# Altium PCB EtherIOv3_2.PcbDoc (part 1 of 2)
Units mil, origin at the board's own origin, x right, y up, seen from the top; angles counter-clockwise.
Board outline 4380 x 2544.37 mil, 2 copper layers (Top Layer, Bottom Layer), stack 63.824 mil thick; 111 components, 138 nets, 525 pads, 210 vias.
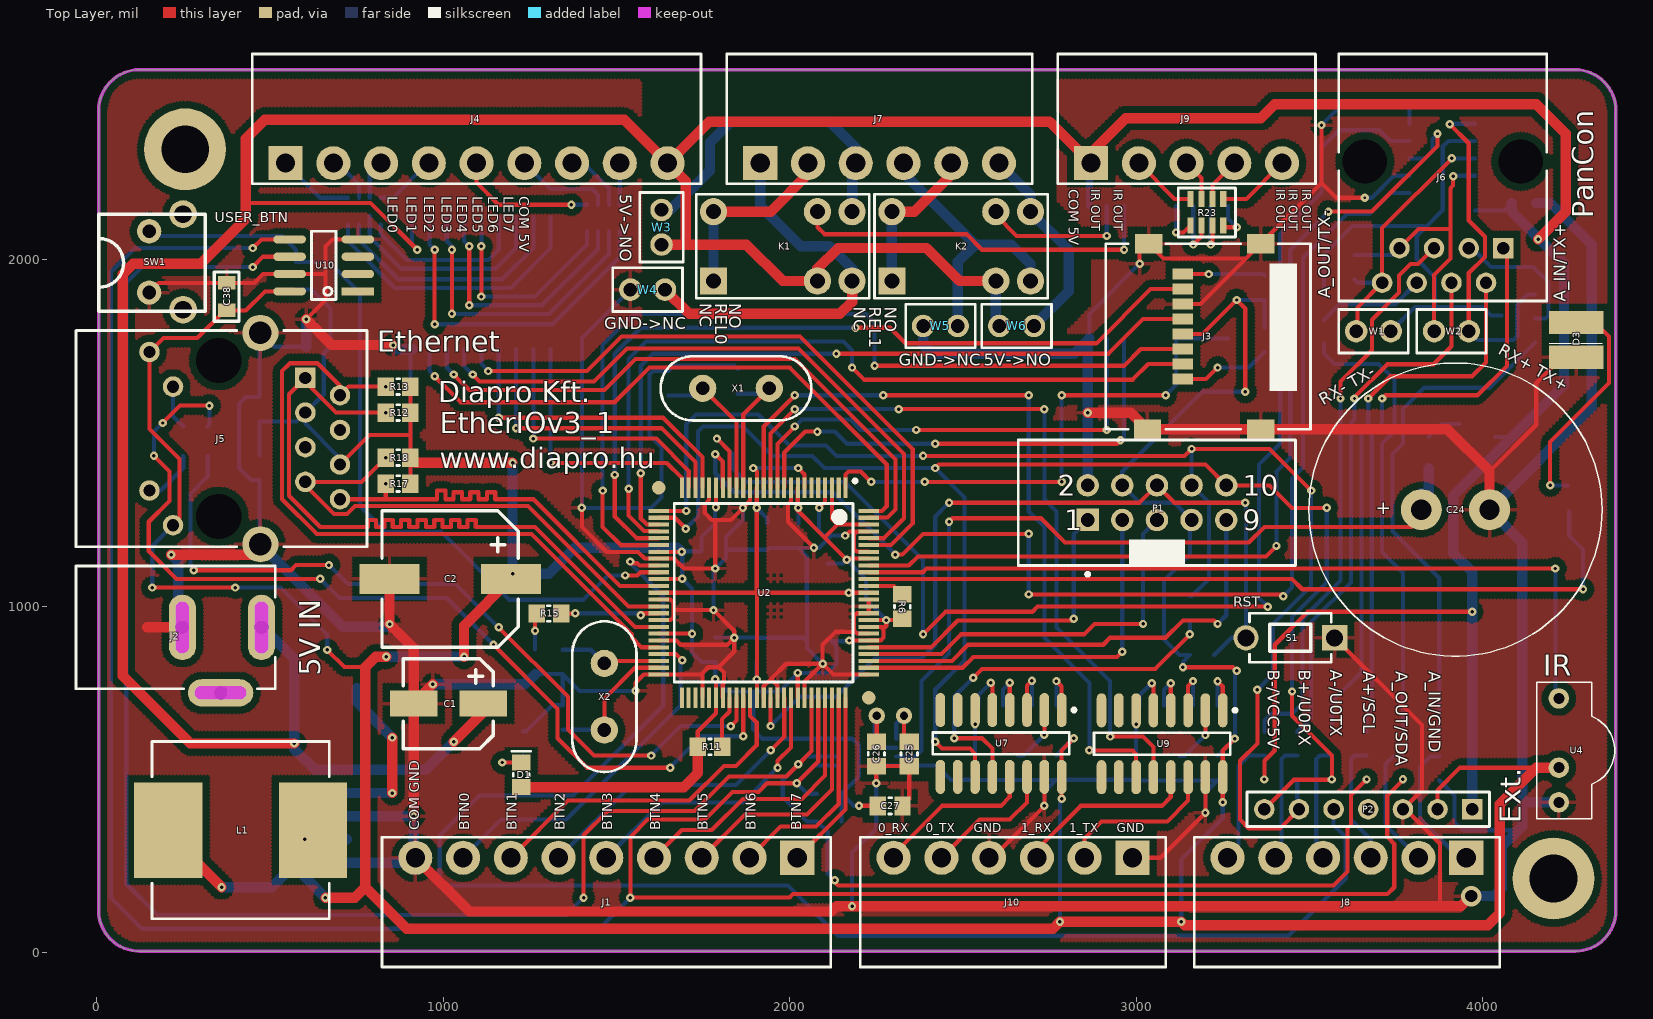
[diagram p0: Top Layer view]
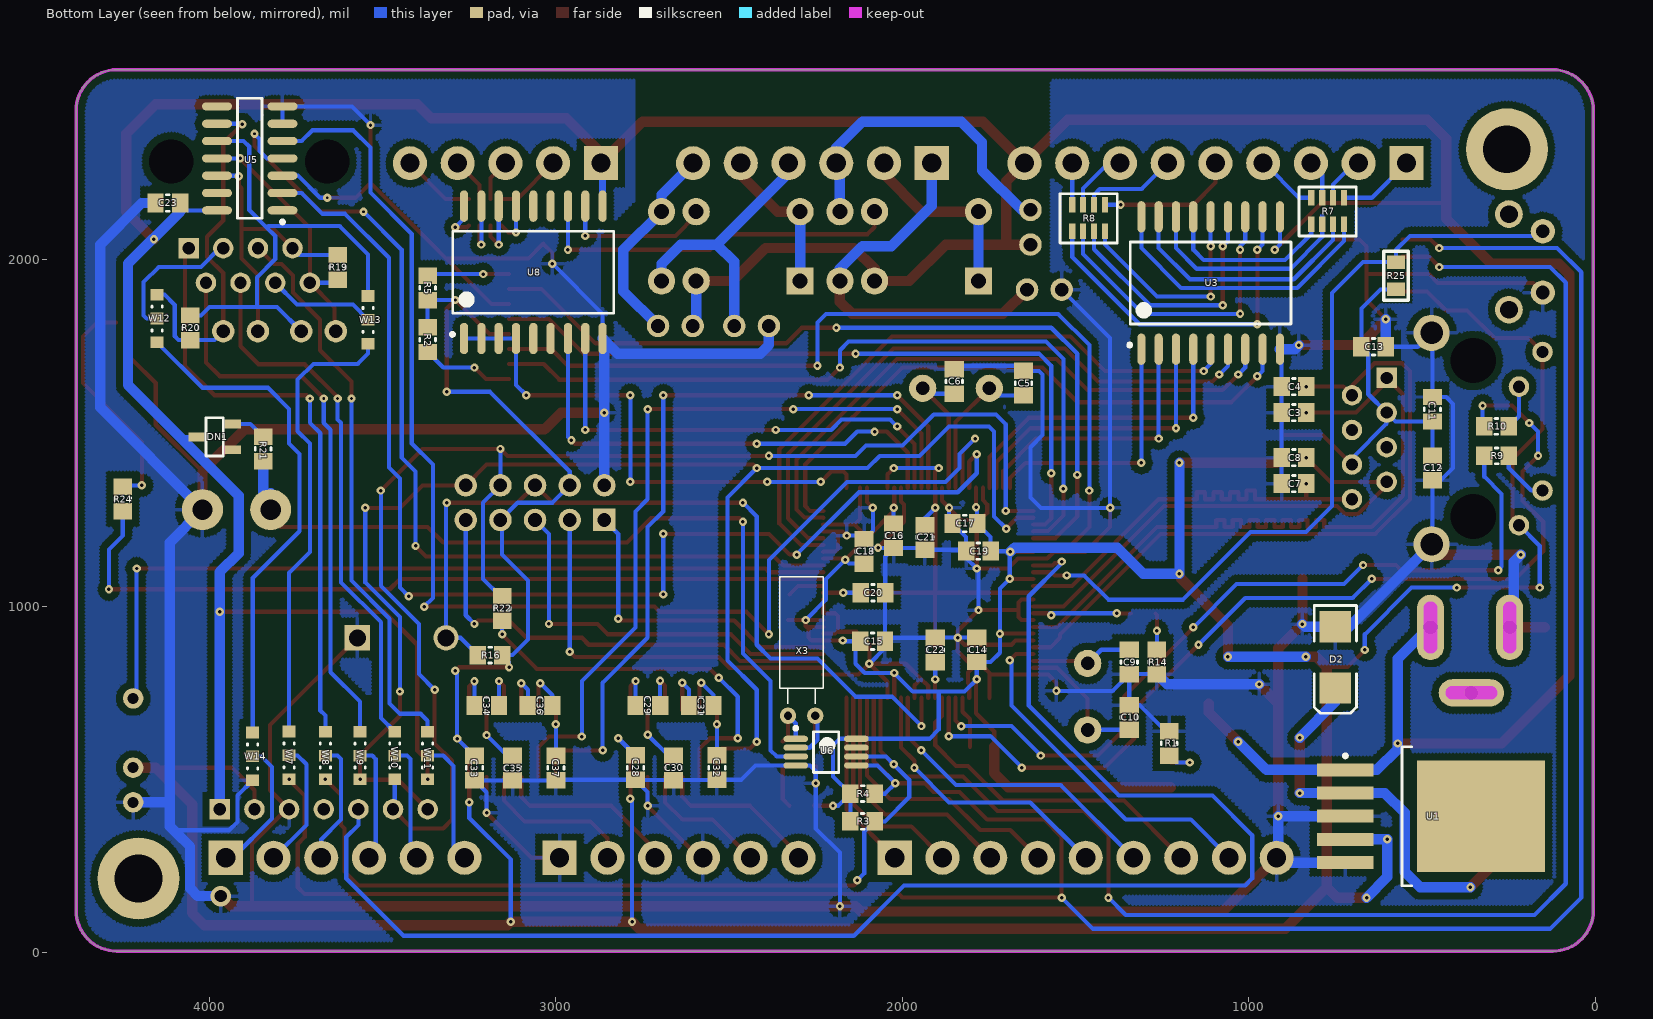
[diagram p1: Bottom Layer view, seen from below]

## Layer stack, top to bottom
Top Layer: signal copper 1.4
Dielectric: core 61.0236, FR-4, Dk 4.8
Bottom Layer: signal copper 1.4

## Board outline
5,122.87 5,2431.02 cw(c123.11,2431.02) 123.11,2549.13 4266.89,2549.13 cw(c4266.89,2431.02) 4385,2431.02 4385,122.87 cw(c4266.89,122.87) 4266.89,4.76 123.11,4.76 cw(c123.11,122.87)

## Design rules (kind name [scope] priority, off if disabled: settings)
Clearance Clearance_to_uc [All vs (InNamedPolygon('BottomLayer-GND'))  or (InNamedPolygon('Top Layer-GND'))] p1: gap=20
Clearance [Not OnLayer('Keep-Out Layer') vs Not OnLayer('Keep-Out Layer')] p2: gap=7
HoleSize [All] p1: absolutevalues=TRUE maxlimit=140 minlimit=1 maxpercent=80.000 minpercent=20.000
MinimumSolderMaskSliver [All] p1: minsoldermaskwidth=1
PolygonConnect [All] p1: connectstyle=Relief reliefconductorwidth=10 reliefentries=4 polygonreliefangle="90 Angle"
RoutingVias [All] p1: holewidth=8 width=24 viastyle="Through Hole" minholewidth=8 minwidth=24 maxholewidth=100 maxwidth=200
SilkscreenOverComponentPads [All] p1: minsilkscreentomaskgap=0
SolderMaskExpansion [All] p1: expansion=4
Width Width_Power [(InNet('NetU1_5') OR InNet('NetU1_18'))] p1: maxlimit=50 minlimit=10 preferedwidth=25
Width [All] p2: maxlimit=30 minlimit=8 preferedwidth=12
25 further rules are at their usual default settings.

## Classes and differential pairs
component class Supplements: C23 C24 C25 C26 C27 C28 C29 C30 C31 C32 C33 C34 C35 C36 C37 DN1 J6 J7 J8 J9 J10 K1 K2 P2 R19 R20 R21 R22 R23 U5 U6 U7 U8 U9 W1 W2 W3 W4 W5 W6 W7 W8 W9 W10 W11 W12 W13 W14 X3
component class EtherIOv3_2: C1 C2 C3 C4 C5 C6 C7 C8 C9 C10 C11 C12 C13 C14 C15 C16 C17 C18 C19 C20 C21 C22 C38 D1 D2 D3 J1 J2 J3 J4 J5 L1 P1 R1 R2 R3 R4 R5 R6 R7 R8 R9 R10 R11 R12 R13 R14 R15 R16 R17 R18 R24 R25 S1 SW1 U1 U2 U3 U4 U10 X1 X2

## Components (designator, comment, footprint, x,y, rotation, side; value= is the part's Value field where it differs from the comment)
C1 "100uF_25V" "ELECTROLIT CAP F80" 1015,719.45 r0 top
C2 "1000uF_6V3" "ELECTROLIT CAP J10" 1020,1079.45 r0 top
C3 "CAP" "0805 CAP" 869.57,1559.45 r0 bottom
C4 "CAP" "0805 CAP" 869.57,1634.45 r0 bottom
C5 "CAP" "0805 CAP" 1650,1644.45 r270 bottom
C6 "CAP" "0805 CAP" 1850,1649.45 r270 bottom
C7 "CAP" "0805 CAP" 869.57,1354.45 r0 bottom
C8 "CAP" "0805 CAP" 869.57,1429.45 r0 bottom
C9 "CAP" "0805 CAP" 1345,839.45 r90 bottom
C10 "CAP" "0805 CAP" 1345,679.45 r270 bottom
C11 "CAP" "0805 CAP" 470,1569.02 r270 bottom
C12 "CAP" "0805 CAP" 470,1399.88 r270 bottom
C13 "CAP" "0805 CAP" 639.57,1749.45 r180 bottom
C14 "CAP" "0805 CAP" 1785,874.88 r270 bottom
C15 "CAP" "0805 CAP" 2085.43,899.45 r0 bottom
C16 "CAP" "0805 CAP" 2025,1204.02 r90 bottom
C17 "CAP" "0805 CAP" 1819.57,1239.45 r180 bottom
C18 "CAP" "0805 CAP" 2110,1159.02 r270 bottom
C19 "CAP" "0805 CAP" 1780.43,1159.45 r180 bottom
C20 "CAP" "0805 CAP" 2084.57,1039.45 r0 bottom
C21 "CAP" "0805 CAP" 1935,1199.02 r90 bottom
C22 "CAP" "0805 CAP" 1905,874.02 r270 bottom
C23 "CAP" "0805 CAP" 4120,2164.45 r0 bottom
C24 "ELKO" Goldcap_1F 3921.57,1279.45 r180 top
C25 "CAP" "0805 CAP" 2345,574.45 r90 top
C26 "CAP" "0805 CAP" 2250,574.45 r90 top
C27 "CAP" "0805 CAP" 2290,424.45 r0 top
C28 "CAP" "0805 CAP" 2770,534.88 r270 bottom
C29 "CAP" "0805 CAP" 2734.57,714.45 r0 bottom
C30 "CAP" "0805 CAP" 2660,534.02 r270 bottom
C31 "CAP" "0805 CAP" 2580.43,714.45 r180 bottom
C32 "CAP" "0805 CAP" 2535,534.88 r270 bottom
C33 "CAP" "0805 CAP" 3235,534.02 r270 bottom
C34 "CAP" "0805 CAP" 3199.57,713.58 r0 bottom
C35 "CAP" "0805 CAP" 3125,533.15 r270 bottom
C36 "CAP" "0805 CAP" 3045.43,713.58 r180 bottom
C37 "CAP" "0805 CAP" 3000,534.02 r270 bottom
C38 "100nF" FP_0805_CAP_125 375,1894.45 r90 top
D1 "PWR" "0805 LED" 1225,514.02 r90 top
D2 "D Schottky" DSO-C2/X2.3 750,853.03 r270 bottom
D3 "LED_RED" "Osram sideled" 4270,1769.45 r90 top
DN1 "BAR43S" DIODE_SOT23_serial 3985,1489.45 r180 bottom
J1 "BUTTONS" "Euroblock 3.5pitch 9P" 2021.77,274.41 r180 top
J2 "PWR2.5" KLD-0202 -60,939.45 r0 top
J3 "MicroSD" microSD 3135,1656.14 r90 top
J4 "LEDS" "Euroblock 3.5pitch 9P" 545,2279.45 r0 top
J5 "EthernetConnector" LU1T516-43 30,1484.45 r90 top
J6 "RJ45-PanBeam" JACK1.27-2H8B 3885,2594.45 r180 top
J7 "Relays" "Euroblock 3.5pitch 6P" 1915,2279.45 r0 top
J8 "PB audio IN/Extension" "Euroblock 3.5pitch 6P" 3952.8,274.45 r180 top
J9 "Infra OUT" "Euroblock 3.5pitch 5P" 2870,2279.45 r0 top
J10 "RS232" "Euroblock 3.5pitch 6P" 2988.98,274.45 r180 top
K1 "REL0" RSY-12 1980,1939.45 r90 top
K2 "REL1" RSY-12 2495,1939.45 r90 top
L1 "100uH" INDP127127X85N 415,354.45 r0 top
P1 "Header 5X2" IDC2.54-V10D 3060,1299.45 r0 top
P2 "Extension" HDR1X7 3970,414.45 r180 top
R1 "RES" "0805 RES" 1230,604.45 r270 bottom
R2 "RES" "0805 RES" 3370,1769.88 r90 bottom
R3 "RES" "0805 RES" 2114.57,379.45 r0 bottom
R4 "RES" "0805 RES" 2114.57,459.45 r0 bottom
R5 "RES" "0805 RES" 3370,1919.45 r270 bottom
R6 "RES" "0805 RES" 2325,999.45 r270 top
R7 "4x Res Array" "1206 4XRES ARRAY" 725,2179.45 r0 bottom
R8 "4x Res Array" "1206 4XRES ARRAY" 1415,2159.45 r0 bottom
R9 "RES" "0805 RES" 284.57,1434.45 r180 bottom
R10 "RES" "0805 RES" 285,1519.45 r180 bottom
R11 "RES" "0805 RES" 1770,594.45 r180 top
R12 "RES" "0805 RES" 869.57,1559.45 r0 top
R13 "RES" "0805 RES" 869.57,1634.45 r0 top
R14 "RES" "0805 RES" 1265,839.88 r90 bottom
R15 "RES" "0805 RES" 1305,979.45 r0 top
R16 "RES" "0805 RES" 3190,859.45 r180 bottom
R17 "RES" "0805 RES" 869.57,1354.45 r0 top
R18 "RES" "0805 RES" 869.57,1429.45 r0 top
R19 "RES" "0805 RES" 3630,1978.78 r90 bottom
R20 "RES" "0805 RES" 4055,1804.21 r90 bottom
R21 "RES" "0805 RES" 3845,1454.45 r270 bottom
R22 "RES" "0805 RES" 3155,994.45 r270 bottom
R23 "4x Res Array" "1206 4xRES ARRAY" 3251.5,2176.22 r180 top
R24 "RES" "0805 RES" 4250,1309.88 r270 bottom
R25 "10k" FP_0805_RES 575,1954.45 r90 bottom
S1 "SW-PB" SPST-2 3445,909.45 r180 top
SW1 "SW_tactile_2pin" "BUTTON_6X6 90deg" 200,1994.45 r270 top
U1 "TS2576" TO-263-5L 475,394.45 r180 bottom
U2 "LM3S6911-IQC" QFP50P1600X1600X160-100N 1925,1039.45 r270 top
U3 "ULN2803A" SOIC127P1030X265-18N 1110,1933.5 r90 bottom
U4 "TSOP1736" TSOP17xx 4220,584.45 r90 top
U5 "MAX491ESD" NSO14_N 3883.62,2293.27 r0 bottom
U6 "MCP79411" MSOP8 2220,579.45 r180 bottom
U7 "MAX3232CSE" NSO16_M 2610,604.45 r270 top
U8 "ULN2803A" SOIC127P1030X265-18N 3065,1964.45 r90 bottom
U9 "MAX3232CSE" NSO16_M 3075,603.58 r270 top
U10 "MB85RC16PNF" DIGITAL_SOIC8 655,1984.45 r180 top
W1 "Jumper" Jumper 3685,1794.21 r180 top
W2 "Jumper" Jumper 3910,1794.21 r180 top
W3 "Jumper" JUMPER 1630,2094.45 r270 top
W4 "Jumper" JUMPER 1590,1914.45 r180 top
W5 "Jumper" JUMPER 2435,1809.45 r180 top
W6 "Jumper" JUMPER 2655,1809.45 r180 top
W7 "ALARM_OUT/SDA" "0603 3WAY JUMPER"#1 3770,604.45 r270 bottom
W8 "A+/SCL" "0603 3WAY JUMPER"#1 3665,603.9 r270 bottom
W9 "A-/U0TX" "0603 3WAY JUMPER"#1 3565,603.9 r270 bottom
W10 "B+/U0RX" "0603 3WAY JUMPER"#1 3465,603.9 r270 bottom
W11 "B-/VCC5V" "0603 3WAY JUMPER"#1 3370,603.9 r270 bottom
W12 "TX+/ALRM_IN" "0603 3WAY JUMPER"#2 4151,1834 r90 bottom
W13 "TX-/ALARM_OUT" "0603 3WAY JUMPER"#2 3542,1830 r90 bottom
W14 "ALRM_IN / GND" "0603 3WAY JUMPER"#2 3875,570 r90 bottom
X1 "CRYSTAL" CRYSTAL_LOW 1845,1629.45 r0 top
X2 "CRYSTAL" CRYSTAL_LOW 1465,739.45 r270 top
X3 "CRYSTAL" CRYSTAL_MINI 2290.63,684.45 r180 bottom

## Footprints (in the part's own frame and the unit in brackets; to place one, negate y for a bottom-side part, rotate by r counter-clockwise, add the part's x,y. Pads: shape width x height; smd on the part's side, far side on the other; paste and mask are expansions set on the pad)
"0603 3WAY JUMPER"#1 [mm] "Chip Resistor, 2-Leads, Body 1,6x0,8mm, IPC Medium Density"
  rect 0.85x0.95 smd: 1(-0.875,0) 2(0.875,0) 3(2.625,0)
  silkscreen extent -0.05,-0.38 1.8,0.38, body extent -0.8,-0.45 2.5,0.45, height 0.55
"0603 3WAY JUMPER"#2 [mm] "Chip Resistor, 2-Leads, Body 1,6x0,8mm, IPC Medium Density"
  rect 0.85x0.95 smd: 1(1.675,0) 2(-0.075,0) 3(-1.825,0)
  silkscreen extent -1,-0.38 0.85,0.38, body extent -1.7,-0.45 1.6,0.45, height 0.55
"0805 CAP" [mm] "Chip Capacitor, 2-Leads, Body 2,0x1,3mm, IPC Medium Density"
  rect 1.2x1.4 smd: 1(-0.9,0) 2(0.9,0)
  silkscreen extent -0.1,-0.6 0.1,0.6, body extent -1.05,-0.67 1.05,0.67, height 1
"0805 LED" [mm] "SMD LED, 2-Leads, Body 2,0x1,3mm, IPC Medium Density"
  rect 1.2x1.35 smd: 1(-0.9,0) 2(0.9,0)
  silkscreen extent -0.1,-0.7 1.73,0.7, body extent -1.05,-0.67 1.05,0.67, height 1
"0805 RES" [mm] "Chip Resistor, 2-Leads, Body 2,0x1,3mm, IPC Medium Density"
  rect 1.2x1.35 smd: 1(-0.9,0) 2(0.9,0)
  silkscreen extent -0.1,-0.58 0.1,0.58, body extent -1.05,-0.67 1.05,0.67, height 1
"1206 4XRES ARRAY" [mm] "Chip Resistor, 2-Leads, Body 3,2x1,6mm, IPC Medium Density"
  rect 0.45x1.15 smd: 1(0,0) 2(0.8,0) 3(1.6,0) 4(2.4,0) 5(2.4,1.95) 6(1.6,1.95) 7(0.8,1.95) 8(0,1.95)
  silkscreen extent -0.9,-0.8 3.3,2.8, body extent -0.6,-0.3 3,2.3, height 0.6
"1206 4xRES ARRAY" [mm] "Chip Resistor, 2-Leads, Body 3,2x1,6mm, IPC Medium Density"
  rect 0.45x1.15 smd: 1(0,0) 2(0.8,0) 3(1.6,0) 4(2.4,0) 5(2.4,1.95) 6(1.6,1.95) 7(0.8,1.95) 8(0,1.95)
  silkscreen extent -0.9,-0.8 3.3,2.8, body extent -0.6,-0.3 3,2.3, height 0.6
"BUTTON_6X6 90deg" [mil]
  round 70 hole 39.37: 1(88.5,-49) 2(-88.5,-49)
  round 80 hole 51: 3(-138,49) 3(138,49)
  silkscreen extent -137,-195 143,112, body extent -168,-199 171,110, height 287
CRYSTAL_LOW [mm]
  round 2 hole 1: 1(-2.44,0) 2(2.44,0)
  silkscreen extent -5.53,-2.35 5.53,2.35, body extent -5.6,-2.4 5.6,2.4, height 3.7
CRYSTAL_MINI [mm] "Furatszerelt D-3.1x8.2"
  round 1.2 hole 0.6: 1(-1,0) 2(1,0)
  silkscreen extent -1.6,0.89 1.6,10.2, body extent -1.5,2.1 1.49,10.1, height 3
DIGITAL_SOIC8 [mm]
  rect 2.4x0.6 smd: 1(-2.5,1.905)
  oval 2.4x0.6 smd: 2(-2.5,0.635) 3(-2.5,-0.635) 4(-2.5,-1.905) 5(2.5,-1.905) 6(2.5,-0.635) 7(2.5,0.635) 8(2.5,1.905)
  silkscreen extent -0.9,-2.5 0.9,2.5, body extent -3.03,-2.5 3.03,2.5, height 1.9
DIODE_SOT23_serial [mm] "SOT23-3 tok"
  rect 1.2x0.65 smd: A(1.327,-0.95) COM(-1.327,0) K(1.327,0.95)
  silkscreen extent -0.64,-1.4 0.64,1.4, body extent -1.27,-1.46 1.27,1.46, height 0.97
DSO-C2/X2.3 [mm] "DO-214-AA/SMB; 2 C-Bend Leads; Body 5.3 x 3.6 mm, inc. leads (LxW)"
  rect 2.3x2.3 smd: 1(-2.25,0) 2(2.25,0)
  silkscreen extent -3.8,-1.55 4.1,1.55
"ELECTROLIT CAP F80" [mm]
  rect 3.5x1.9 smd: 1(-2.55,0) 2(2.55,0)
  silkscreen extent -3.3,-3.3 3.3,3.3, body extent -3.3,-3.3 3.3,3.3, height 7.6
"ELECTROLIT CAP J10" [mm]
  rect 4.4x2.2 smd: 1(-4.45,0) 2(4.45,0)
  silkscreen extent -5,-5 5,5, body extent -5,-5 5,5, height 10
"Euroblock 3.5pitch 5P" [mm] "3.5 mm pitch 5P connector"
  rect 2.5x2.5 hole 1.4: 1(0,0)
  round 2.5 hole 1.4 mask+0.102: 2(3.5,0) 3(7,0) 4(10.5,0) 5(14,0)
  silkscreen extent -2.45,-1.5 16.45,8, body extent -2.45,-1.5 16.45,8, height 7.2
"Euroblock 3.5pitch 6P" [mm] "3.5 mm pitch 6P connector"
  rect 2.5x2.5 hole 1.4: 1(0,0)
  round 2.5 hole 1.4 mask+0.102: 2(3.5,0) 3(7,0) 4(10.5,0) 5(14,0) 6(17.5,0)
  silkscreen extent -2.45,-1.5 19.95,8, body extent -2.45,-1.5 19.95,8, height 7.2
"Euroblock 3.5pitch 9P" [mm] "3.5 mm pitch 9P connector"
  rect 2.5x2.5 hole 1.4: 1(0,0)
  round 2.5 hole 1.4 mask+0.102: 2(3.5,0) 3(7,0) 4(10.5,0) 5(14,0) 6(17.5,0) 7(21,0) 8(24.5,0) 9(28,0)
  silkscreen extent -2.45,-1.5 30.45,8, body extent -2.45,-1.5 30.45,8, height 7.2
FP_0805_CAP_125 [mm] "0805 kapacitás YAGEO/NIC 1.25 mm magas"
  rect 1x1.3 smd: 1(-1,0) 2(1,0)
  silkscreen extent -1.8,-0.9 1.8,0.9, body extent -1,-0.64 1.03,0.64, height 1.25
FP_0805_RES [mm] "0805 ellenállás"
  rect 1x1.3 smd: 1(-1,0) 2(1,0)
  silkscreen extent -1.8,-0.9 1.8,0.9, body extent -1,-0.62 1,0.63, height 0.62
Goldcap_1F [mm] "Goldcap 1F 21.5x8mm"
  round 3 hole 1.5: 1(-2.5,0) 2(2.5,0)
  silkscreen extent -10.75,-10.75 10.75,10.75, body extent -10.72,-10.7 10.7,10.76, height 8
HDR1X7 [mm] "Connector; Header; 7 Position"
  rect 1.5x1.5 hole 0.9: 1(0,0)
  round 1.5 hole 0.9: 2(2.54,0) 3(5.08,0) 4(7.62,0) 5(10.16,0) 6(12.7,0) 7(15.24,0)
  silkscreen extent -1.27,-1.27 16.51,1.27
IDC2.54-V10D [mm] "Connector; IDC, Low Profile Male Header, Thru-Hole; 10 Position; Vertical; Pitch 2.54 mm; Body 20.32 x 9.2 x 9.45 mm (LxWxH)"
  rect 1.65x1.65 hole 1: 1(-5.08,-1.27)
  round 1.65 hole 1: 2(-5.08,1.27) 3(-2.54,-1.27) 4(-2.54,1.27) 5(0,-1.27) 6(0,1.27) 7(2.54,-1.27) 8(2.54,1.27) 9(5.08,-1.27) 10(5.08,1.27)
  silkscreen extent -10.16,-5.37 10.16,4.6, body extent -10.16,-4.6 10.16,4.6, height 9.45
INDP127127X85N [mm] "Precision Wire Wound Inductor, 2-Leads, Body 12,7x12,7mm, IPC Medium Density"
  rect 5x7 smd: 1(-5.3,0) 2(5.3,0)
  silkscreen extent -6.5,-6.5 6.5,6.5, body extent -6.5,-6.5 6.5,6.5, height 8.5
JACK1.27-2H8B [mm] "Connector; PCB Jack, Thru-Hole; 1-Port, 8 Positions, 8 Loaded; Unshielded without Lightpipes; Right Angle"
  rect 1.5x1.5 hole 0.9: 1(-4.445,14.23)
  round 1.5 hole 0.9: 2(-3.175,16.77) 3(-1.905,14.23) 4(-0.635,16.77) 5(0.635,14.23) 6(1.905,16.77) 7(3.175,14.23) 8(4.445,16.77)
  round 2.95 hole 3.25 unplated: MH1(-5.715,7.88) MH2(5.715,7.88)
  silkscreen extent -7.62,0 7.62,18.1, body extent -7.62,0 7.62,18.1, height 8.65
Jumper [mm] "Jumper, 2.54 pitch"
  round 1.65 hole 1: 1(-1.27,0) 2(1.27,0)
  silkscreen extent -2.55,-1.6 2.55,1.6, body extent -2.54,-1.6 2.54,1.6, height 8.54
JUMPER [mm] "Jumper, 2.54 pitch"
  round 1.65 hole 1: 1(-1.27,0) 2(1.27,0)
  silkscreen extent -2.55,-1.6 2.55,1.6, body extent -2.54,-1.6 2.54,1.6, height 8.54
KLD-0202 [mm] "DC Power Jack, 2.5mm, KLD Series, PCB Mount"
  oval 2x4.8 hole 1: 1(13.6,0) 2(7.8,0)
  oval 4.8x2 hole 1: 3(10.6,-4.8)
  Keep-Out Layer lines w1: 7.8,-1.4 7.8,1.4 ; 9.2,-4.8 12,-4.8 ; 13.6,-1.4 13.6,1.4
  silkscreen extent 0,-4.5 14.6,4.5, body extent 0,-4.5 14.6,4.5, height 10.7
LU1T516-43 [mm] "Connector; PCB Jack, Thru-Hole; 1-Port, 8 Positions, 8 Loaded; Shielded without Lightpipes; Right Angle"
  round 2.65 hole 1.651: MH1(7.747,-11.227) MH2(-7.747,-11.227)
  round 2.95 hole 3.302 unplated: MH3(5.715,-8.179) MH4(-5.715,-8.179)
  rect 1.5x1.5 hole 0.9: P1(4.445,-14.529)
  round 1.5 hole 0.9: P2(3.175,-17.069) P3(1.905,-14.529) P4(0.635,-17.069) P5(-0.635,-14.529) P6(-1.905,-17.069) P7(-3.175,-14.529) P8(-4.445,-17.069) P9(6.35,-3.099) P10(3.81,-4.826) P11(-3.81,-3.099) P12(-6.35,-4.826)
  silkscreen extent -7.92,-19.05 7.92,2.29, body extent -7.87,-19.05 7.87,2.29, height 12.09
microSD [mm]
  rect 0.8x1.5 smd: 1(0,0) 2(1.1,0) 3(2.2,0) 4(3.3,0) 5(4.4,0) 6(5.5,0) 7(6.6,0) 8(7.7,0)
  rect 1.45x2 smd: 9(-3.675,2.6) 10(9.925,2.5) 11(-3.675,-5.7) 12(9.925,-5.7)
  Top Overlay keep-out region: -0.888,-8.349 8.462,-8.349 8.462,-6.349 -0.888,-6.349
  silkscreen extent -3.67,-9.35 9.92,5.65
MSOP8 [mm] "MSOP, 8-Leads, Body 3,0x3,0mm (max), Pitch 0,65mm, IPC Medium Density"
  oval 1.8x0.45 smd: 1(-2.225,0.975) 2(-2.225,0.325) 3(-2.225,-0.325) 4(-2.225,-0.975) 5(2.225,-0.975) 6(2.225,-0.325) 7(2.225,0.325) 8(2.225,0.975)
  silkscreen extent -2.35,-1.5 0.92,1.87, body extent -1.52,-1.53 1.53,1.52, height 1.1
NSO14_N [mm] "SOIC, 14-Leads, Body 8.7x3.9mm, Pitch 1.27mm, IPC Medium Density"
  oval 2.2x0.6 smd: 1(-2.4,3.81) 2(-2.4,2.54) 3(-2.4,1.27) 4(-2.4,0) 5(-2.4,-1.27) 6(-2.4,-2.54) 7(-2.4,-3.81) 8(2.4,-3.81) 9(2.4,-2.54) 10(2.4,-1.27) 11(2.4,0) 12(2.4,1.27) 13(2.4,2.54) 14(2.4,3.81)
  silkscreen extent -2.52,-4.4 0.9,4.78, body extent -2,-4.38 2,4.38, height 1.75
NSO16_M [mm] "SOIC, 16-Leads, Body 9.9x3.9mm, Pitch 1.27mm, IPC Low Density"
  oval 2.5x0.7 smd: 1(-2.45,4.445) 2(-2.45,3.175) 3(-2.45,1.905) 4(-2.45,0.635) 5(-2.45,-0.635) 6(-2.45,-1.905) 7(-2.45,-3.175) 8(-2.45,-4.445) 9(2.45,-4.445) 10(2.45,-3.175) 11(2.45,-1.905) 12(2.45,-0.635) 13(2.45,0.635) 14(2.45,1.905) 15(2.45,3.175) 16(2.45,4.445)
  silkscreen extent -2.57,-5 0.8,5.47, body extent -2,-5 2,5, height 1.75
"Osram sideled" [mil]
  rect 67x157.48 smd paste+0: A(50,0)
  rect 67x157.48 smd: K(-50,0)
  silkscreen extent -10,-76 -10,78, body extent -77,-79 81,69, height 158
QFP50P1600X1600X160-100N [mm] "QFP,0.50mm pitch,square;25 pin X 25 pin,14.00mm X 14.00mm X 1.60mm H body"
  rect 1.5x0.3 smd: 1(-7.7,6) 2(-7.7,5.5) 3(-7.7,5) 4(-7.7,4.5) 5(-7.7,4) 6(-7.7,3.5) 7(-7.7,3) 8(-7.7,2.5) 9(-7.7,2) 10(-7.7,1.5) 11(-7.7,1) 12(-7.7,0.5) 13(-7.7,0) 14(-7.7,-0.5) 15(-7.7,-1) 16(-7.7,-1.5) 17(-7.7,-2) 18(-7.7,-2.5) 19(-7.7,-3) 20(-7.7,-3.5) 21(-7.7,-4) 22(-7.7,-4.5) 23(-7.7,-5) 24(-7.7,-5.5) 25(-7.7,-6) 51(7.7,-6) 52(7.7,-5.5) 53(7.7,-5) 54(7.7,-4.5) 55(7.7,-4) 56(7.7,-3.5) 57(7.7,-3) 58(7.7,-2.5) 59(7.7,-2) 60(7.7,-1.5) 61(7.7,-1) 62(7.7,-0.5) 63(7.7,0) 64(7.7,0.5) 65(7.7,1) 66(7.7,1.5) 67(7.7,2) 68(7.7,2.5) 69(7.7,3) 70(7.7,3.5) 71(7.7,4) 72(7.7,4.5) 73(7.7,5) 74(7.7,5.5) 75(7.7,6)
  rect 0.3x1.5 smd: 26(-6,-7.7) 27(-5.5,-7.7) 28(-5,-7.7) 29(-4.5,-7.7) 30(-4,-7.7) 31(-3.5,-7.7) 32(-3,-7.7) 33(-2.5,-7.7) 34(-2,-7.7) 35(-1.5,-7.7) 36(-1,-7.7) 37(-0.5,-7.7) 38(0,-7.7) 39(0.5,-7.7) 40(1,-7.7) 41(1.5,-7.7) 42(2,-7.7) 43(2.5,-7.7) 44(3,-7.7) 45(3.5,-7.7) 46(4,-7.7) 47(4.5,-7.7) 48(5,-7.7) 49(5.5,-7.7) 50(6,-7.7) 76(6,7.7) 77(5.5,7.7) 78(5,7.7) 79(4.5,7.7) 80(4,7.7) 81(3.5,7.7) 82(3,7.7) 83(2.5,7.7) 84(2,7.7) 85(1.5,7.7) 86(1,7.7) 87(0.5,7.7) 88(0,7.7) 89(-0.5,7.7) 90(-1,7.7) 91(-1.5,7.7) 92(-2,7.7) 93(-2.5,7.7) 94(-3,7.7) 95(-3.5,7.7) 96(-4,7.7) 97(-4.5,7.7) 98(-5,7.7) 99(-5.5,7.7) 100(-6,7.7)
  round 1 smd: 101(-7.7,-7.7) 102(7.7,7.7)
  Top Layer pour cut-out: 154 vertices and 0 holes, not listed, extent 6.7,6.7 8.7,8.7
  Top Layer pour cut-out: 154 vertices and 0 holes, not listed, extent -8.7,-8.7 -6.7,-6.7
  silkscreen extent -8.32,-6.55 6.55,6.83
RSY-12 [mm]
  round 2 hole 1.1: COIL1(0,-2.54) COIL2(5.08,-2.54) COM2(5.08,5.08) NC(0,-5.08) NO(5.08,-5.08)
  rect 2x2 hole 1.1: COM1(0,5.08)
  silkscreen extent -1.27,-6.35 6.35,6.35, body extent -1.27,-6.35 6.35,6.35, height 10.2
SOIC127P1030X265-18N [mm] "SOIC, 18-Leads, Body 11,8x7,6mm (max), Pitch 1,27mm, IPC Medium Density"
  oval 2.3x0.6 smd: 1(-4.85,5.08) 2(-4.85,3.81) 3(-4.85,2.54) 4(-4.85,1.27) 5(-4.85,0) 6(-4.85,-1.27) 7(-4.85,-2.54) 8(-4.85,-3.81) 9(-4.85,-5.08) 10(4.85,-5.08) 11(4.85,-3.81) 12(4.85,-2.54) 13(4.85,-1.27) 14(4.85,0) 15(4.85,1.27) 16(4.85,2.54) 17(4.85,3.81) 18(4.85,5.08)
  silkscreen extent -4.67,-5.9 3,6.06, body extent -3.8,-5.87 3.8,5.87, height 2.65
SPST-2 [mm] "Circuit Breaker; 2 Leads"
  rect 1.85x1.85 hole 1.25: 1(-3.25,0)
  round 1.85 hole 1.25: 2(3.25,0)
  silkscreen extent -3,-1.8 3,1.8
TO-263-5L [mm] "D2-PAK, 6-Pads, Body 8,3x10,2mm (max), IPC Medium Density"
  rect 4.15x0.95 smd: 1(-6.25,3.4) 2(-6.25,1.7) 3(-6.25,0) 4(-6.25,-1.7) 5(-6.25,-3.4)
  rect 9.4x8.2 smd: 6(3.7,0)
  silkscreen extent -6.38,-5.1 -1.4,5.1, body extent -2.1,-5.1 6.18,5.1, height 4.57
TSOP17xx [mm] "TSOP17xx IR Receiver"
  round 1.5 hole 0.8: 1(-3.81,0) 2(-1.27,0) 3(3.81,0)
  silkscreen extent -5,-4.09 5,1.6, body extent -5,-4.1 5,1.6, height 13.3

## Part data
C1 C2: "SMD Electrolit Capacitor"
C3 C4 C5 C6 C7 C8 C9 C10 C11 C12 C13 C14 C15 C16 C17 C18 C19 C20 C21 C22 C23 C25 C26 C27 C28 C29 C30 C31 C32 C33 C34 C35 C36 C37: "Capacitor"
C24: "Electrolit Capacitor"
C38: library part Cap, "Capacitor"
D1: library part LED2, "Typical RED, GREEN, YELLOW, AMBER GaAs LED"
D2: "Schottky Diode"
D3: library part LED_R, "Typical LED"
J1 J4: library part "Euroblock 9P connector"
J2: "Low Voltage Power Supply Connector"
J6: "PanBeam - RS485 + 2xAudio"
J7 J8 J10: library part "Euroblock 6P connector"
J9: library part "Euroblock 5P connector"
K1 K2: library part Relay, "SPDT Relay"
L1: library part Inductor, "Inductor"
P1: "Header, 5-Pin, Dual row"
P2: library part "Header 7", "Header, 7-Pin"
R1 R2 R3 R4 R5 R6 R9 R10 R11 R12 R13 R14 R15 R16 R17 R18 R19 R20 R21 R22 R24: "Resistor"
R7 R8 R23: "Isolated Resistor Network"
R25: library part Res3, "Resistor"
S1: "Switch"
U1: "Step Down DC-DC Converter"
U2: library part LM3S6611-IQC, "Stellaris ARM Cortex-M3 Microcontroller"
U3 U8: "8xDarlington Driver"
U4: library part TSOP17xx, "IR Receiver, 3-Pin"
U5: "Low-Power, Slew-Rate-Limited RS-485/RS-422 Transceiver"
U6: "MCP79411 I2C RTCC + MAC"
U7 U9: "3.0V TO 5.5V, Low-Power, up to 1Mbps, True RS-232 Transceiver Using Four 0.1µF External Capacitor"
U10: "MB85RC16PNF I2C MEM"
W1 W2 W3 W4 W5 W6: "Jumper Wire"
W7 W8 W9 W10 W11 W12 W13 W14: library part Jumper_3way, "Jumper Wire"
X1 X2 X3: "Crystal"

## Free pads (board coordinates)
  round 236.22 hole 137.8: 0(255,2319.45) 0(4205,214.45)

## Via types
v1: diameter 24, hole 10, Top Layer to Bottom Layer, 202 vias
v2: diameter 24, hole 8, Top Layer to Bottom Layer, 7 vias
v3: diameter 59.06, hole 35.43, Top Layer to Bottom Layer, 1 vias

## Nets (pads, with @x,y where several pads share a name; then routed paths per layer and width w, separated by ;. In a path a pad name is that pad's centre, name@x,y a point inside that pad or via, vN(x,y) a via of type N, cw(c..) or ccw(c..) an arc to the next point about the centre after c; other vN are vias at no path point)
A+: J6.1 W8.1 | length 1723.3
  Top Layer w12: v2(3710,1600) 3719.45,1609.45 3985,1609.45 4070,1694.45 4070,2024.21 J6.1@4060,2034.21
  Bottom Layer w12: W8.1@3665,638.35 3665,685 3680,700 3680,1500 3710,1530 v2(3710,1600)
A+/SCL: J8.3 W8.2 | length 357.8
  Bottom Layer w12: W8.2@3665,569.45 3630,569.45 3620,559.45 3620,384.45 3677.2,327.24 J8.3@3677.2,274.45
A-: J6.2 W9.1 | length 1618.2
  Top Layer w12: v2(3670,1600) 3734.45,1664.45 3970,1664.45 4010,1704.45 J6.2@4010,1934.21
  Bottom Layer w12: W9.1@3565,638.35 3565,725 3650,810 3650,1510 3670,1530 v2(3670,1600)
A-/U0TX: J8.4 W9.2 | length 342.2
  Bottom Layer w12: J8.4@3539.41,274.45 3520,293.86 3520,559.45 3530,569.45 W9.2@3565,569.45
ALARM_OUT: W7.1 W13.3 | length 1318.1
  Bottom Layer w12: W13.3@3542,1758.15 3542,1730 3572,1700 3700,1700 3745.5,1654.5 3745.5,1505.5 3710,1470 3710,1157 3770,1097 W7.1@3770,638.9
ALARM_OUT/SDA: J8.2 W7.2 | length 377
  Bottom Layer w12: W7.2@3770,570 3745.55,570 3720,544.45 3720,369.45 J8.2@3815,274.45 J8.2@3820,279.45
ALRM_IN: W12.3 W14.1 | length 1463
  Bottom Layer w12: W14.1@3875,635.94 3875,1082 3740,1217 3740,1440 3770,1470 3770,1570 3831.15,1631.15 4020,1631.15 W12.3@4151,1762.15
"ALRM_IN / GND": J8.1 W14.2 | length 397.7
  Bottom Layer w12: W14.2@3875,567.05 3850,567.05 3819,536.05 3819,388 3932.55,274.45 J8.1@3952.8,274.45
AN2: P2.4
B+: J6.4 W10.1 | length 1558.1
  Top Layer w12: v2(3630,1600) 3630,1604 3725,1699 3858,1699 3910,1751 J6.4@3910,1934.21
  Bottom Layer w12: W10.1@3465,638.35 3505,678.35 3505,954.45 3620,1069.45 3620,1530 3630,1540 v2(3630,1600)
B+/U0RX: J8.5 W10.2 | length 341.8
  Bottom Layer w12: J8.5@3401.61,274.45 3420,292.83 3420,559.45 3430,569.45 W10.2@3465,569.45
B-: J6.5 W11.1 | length 1646.7
  Top Layer w12: v2(3590,1600) 3590,1649 3680.48,1739.48 3680.48,1827.48 3759,1906 3759,1955 3792,1988 3813.79,1988 J6.5@3860,2034.21
  Bottom Layer w12: W11.1@3370,638.35 3370,670 3390,690 3450,690 3480,720 3480,964.45 3590,1074.45 v2(3590,1600)
B-/VCC5V: J8.6 W11.2 | length 365.3
  Bottom Layer w12: J8.6@3263.82,274.45 3295,305.63 3295,539.45 3325,569.45 W11.2@3370,569.45
BTN0: J1.8 U2.47 | length 1017.7
  Top Layer w12: U2.47@1621.85,862.28 1672.17,862.28 v1(1690,844.45)
  Bottom Layer w12: J1.8@1057.2,274.41 1167.24,384.45 1355,384.45 1685,714.45 1685,839.45 v1(1690,844.45)
BTN1: J1.7 U2.61 | length 989.5
  Top Layer w12: J1.7@1195,274.41 1360.04,439.45 1710,439.45 1810,539.45 1845,539.45 1905,599.45 1905,664.45 1885.63,683.82 U2.61@1885.63,736.3
BTN2: J1.6 U2.66 | length 908.7
  Top Layer w12: v1(1945,584.45) 1984.06,623.5 U2.66@1984.06,736.3
  Bottom Layer w12: J1.6@1332.8,274.41 1542.83,484.45 1845,484.45 v1(1945,584.45)
BTN3: J1.5 U2.67 | length 820
  Top Layer w12: v1(1965,534.45) 1965,554.45 2003.74,593.19 U2.67@2003.74,736.3
  Bottom Layer w12: J1.5@1470.59,274.41 1630.63,434.45 1865,434.45 v1(1965,534.45)
BTN4: J1.4 U2.72 | length 816.7
  Top Layer w12: J1.4@1608.39,274.41 1688.42,354.45 1775,354.45 1865,444.45 2035,444.45 2102.17,511.61 U2.72@2102.17,736.3
BTN5: J1.3 U2.73 | length 722.2
  Top Layer w12: J1.3@1746.18,274.41 1871.22,399.45 2050,399.45 2121.85,471.3 U2.73@2121.85,736.3
BTN6: J1.2 U2.74 | length 628.2
  Top Layer w12: J1.2@1883.98,274.41 1974.02,364.45 2075.87,364.45 2141.54,430.11 U2.74@2141.54,736.3
BTN7: J1.1 U2.75 | length 519.7
  Top Layer w12: J1.1@2021.77,274.41 2161.22,413.86 U2.75@2161.22,736.3
GND: C1.1 C2.1 C3.2 C4.2 C5.1 C6.1 C7.2 C8.2 C9.1 C10.1 C11.1 C12.2 C13.2 C14.1 C15.1 C16.1 C17.1 C18.1 C19.1 C20.1 C21.1 C22.1 C23.2 C24.1 C25.1 C26.1 C27.2 C28.2 C30.2 C32.2 C33.2 C35.2 C37.2 C38.2 D2.1 D3.K J1.9 J2.2 J3.6 J3.9 J3.10 J3.11 J3.12 J5.MH1 J5.MH2 J10.1 J10.4 P1.2 P2.3 R1.1 R14.1 S1.1 SW1.1 U1.3 U1.5 U2.4 U2.9 U2.15 U2.21 U2.33 U2.39 U2.42 U2.45 U2.50 U2.54 U2.57 U2.63 U2.65 U2.69 U2.76 U2.82 U2.85 U2.86 U2.87 U2.94 U2.97 U3.9 U4.1 U5.3 U5.6 U5.7 U6.4 U7.15 U8.9 U9.15 U10.4 U10.7 W4.2 W5.2 W14.3 | length 26292.7
  Top Layer w12: SW1.1@151,1905.95 178.87,1933.82 C38.2@375,1933.82 454.37,1933.82 480,1959.45 U10.7@556.57,1959.45 660,1959.45 ; v1(604.13,1828.58) 660,1884.45 660,1959.45 ; U10.4@753.43,2059.45 680,2059.45 660,2039.45 660,1959.45 ; v1(1400,1284.45) 1400,1229.45 1471.98,1157.46 1561.98,1157.46 1581.57,1137.87 U2.33@1621.85,1137.87 1666.57,1137.87 1695,1109.45 v1(1785,1109.45) 1785,1249.45 ; v1(1555,756.3) 1555,779.45 1578.78,803.23 U2.50@1621.85,803.23 1743.78,803.23 1747.83,807.28 ; U2.45@1621.85,901.65 1672.8,901.65 1685,889.45 1820,889.45 v1(1840,909.45) ; U2.42@1621.85,960.71 1655.98,960.71 1664.38,969.1 1664.38,989.45 ; U2.39@1621.85,1019.76 1655.98,1019.76 1664.38,1011.37 1664.38,989.45 ; U2.54@1747.83,736.3 1747.83,807.28 ; U2.21@1767.52,1342.6 1767.52,1306.97 1755,1294.45 1755,1269.45 1775,1249.45 1785,1249.45 ; U2.57@1806.89,736.3 1806.89,775.98 1810,779.09 1810,809.45 1795,824.45 ; U2.15@1885.63,1342.6 1885.63,1305.08 v1(1865,1284.45) 1830,1249.45 1785,1249.45 ; U2.63@1925,736.3 1925,770.43 1933.39,778.83 1934.38,778.83 1946.12,790.57 ; U2.65@1964.37,736.3 1964.37,772.31 1946.12,790.57 ; U2.9@2003.74,1342.6 2003.74,1303.19 1995,1294.45 1995,1244.45 v1(2070,1169.45) ; U2.69@2043.11,736.3 2043.11,782.56 v1(2095,834.45) ; v1(2085,1284.45) 2102.17,1301.61 U2.4@2102.17,1342.6 ; v1(2160,1204.45) 2172.17,1216.61 2194.02,1216.61 ; 2182.56,926.65 2132.2,926.65 2095,889.45 v1(2095,834.45) ; U2.76@2228.15,803.23 2126.22,803.23 v1(2095,834.45) ; U2.82@2228.15,921.34 2194.02,921.34 2185.62,929.73 2185.62,972 2194.02,980.39 U2.85@2228.15,980.39 U2.86@2228.15,1000.08 U2.87@2228.15,1019.76 ; U2.94@2228.15,1157.56 2227.46,1158.24 2193.33,1158.24 2185.62,1165.95 2185.62,1208.22 2194.02,1216.61 ; U2.97@2228.15,1216.61 2194.02,1216.61 ; v1(2250,489.45) C26.1@2250,539.02 C25.1@2345,539.02 2345,444.02 C27.2@2325.43,424.45 ; J10.4@2575.59,274.45 2585,274.45 v1(2735,424.45) U7.15@2735,507.99 ; J10.1@2988.98,274.45 3070,274.45 v1(3200,404.45) U9.15@3200,507.13 ; v1(3010,1989.45) 3010,2020.31 J3.10@3036.57,2046.89 3079.02,2004.45 3316.97,2004.45 ; J3.6@3135,1872.68 3185.2,1872.68 3316.97,2004.45 ; v1(3535,2389.45) 3535,2222.48 ; S1.1@3572.95,909.45 3825,657.4 3825,469.45 P2.3@3770,414.45 3777.76,414.45 3877.21,315 3877.21,136.24 3879,134.45 ; v2(3660,2179.45) 3578.03,2179.45 3535,2222.48 ; 4020,1389.45 4155,1524.45 4155,1644.45 D3.K@4225,1714.45 ; 1664.38,989.45 v1(1780,989.45) 1840,929.45 v1(1840,909.45) ; 1747.83,807.28 1765,824.45 1795,824.45 ; 1795,824.45 1840,869.45 v1(1840,909.45) ; 1946.12,790.57 1990,834.45 v1(2095,834.45) ; 3316.97,2004.45 J3.12@3359.41,2046.89 3535,2222.48
  Top Layer w30: 145,939.45 J2.2@247.09,939.45 ; v1(215,1149.45) 442,1149.45 J5.MH2@472,1179.45 J5.MH2@472,1176.17 ; v1(604.13,1828.58) 678.27,1754.45 v1(855,1754.45) ; C2.1@844.8,1079.45 844.8,949.25 v1(845,949.06) 914.61,879.45 C1.1@914.61,719.45 ; v1(915,394.45) 914.61,394.84 C1.1@914.61,719.45 ; J1.9@919.41,274.41 1074.37,119.45 2120,119.45 2135,134.45 v1(2180,134.45) 3879,134.45 3937.45,134.45 v3(3967,164) ; v1(970,774.84) C1.1@914.61,719.45 ; v1(2860,1559.45) 2984.65,1559.45 J3.9@3032.64,1511.46 J3.11@3359.41,1511.46 3897.99,1511.46 4020,1389.45 C24.1@4020,1279.45
  Bottom Layer w12: J5.MH2@472,1179.45 470,1181.45 C12.2@470,1364.45 445,1364.45 410,1399.45 410,1584.45 430,1604.45 C11.1@470,1604.45 470,1787.45 J5.MH1@472,1789.45 512,1749.45 C13.2@604.13,1749.45 ; C7.2@905,1354.45 C8.2@905,1429.45 C3.2@905,1559.45 C4.2@905,1634.45 905,1737.56 U3.9@910,1742.56 ; R1.1@1230,639.88 1240.43,639.88 1315.43,714.88 C10.1@1345,714.88 C9.1@1345,804.02 ; R14.1@1265,804.45 1344.57,804.45 C9.1@1345,804.02 ; W4.2@1540,1914.45 1400,1774.45 v1(1400,1284.45) 1600,1284.45 1630,1314.45 1630,1459.45 1595,1494.45 1595,1669.45 1605.43,1679.88 C5.1@1650,1679.88 1664.57,1694.45 1840.43,1694.45 C6.1@1850,1684.88 ; v1(1555,756.3) 1392.72,756.3 C9.1@1345,804.02 ; v1(1780,989.45) 1780,1104.45 v1(1785,1109.45) 1815.87,1140.31 C19.1@1815.87,1159.45 ; C14.1@1785,910.31 1904.13,910.31 C22.1@1905,909.45 2040,909.45 C15.1@2050,899.45 ; v1(1865,1284.45) 1865,1249.45 C17.1@1855,1239.45 1815.87,1200.31 C19.1@1815.87,1159.45 ; v1(2085,1284.45) 2085,1219.45 C18.1@2110,1194.45 ; v1(2095,834.45) 2050,879.45 C15.1@2050,899.45 ; v1(2160,1204.45) 2120,1204.45 C18.1@2110,1194.45 ; v1(2180,134.45) 2180,289.45 2250,359.45 v1(2250,489.45) 2250,524.45 2266.61,541.06 U6.4@2307.6,541.06 2423.39,541.06 2465,499.45 C32.2@2535,499.45 2535.87,498.58 C30.2@2660,498.58 C28.2@2769.13,498.58 ; v1(2735,424.45) 2735,464.45 C28.2@2769.13,498.58 ; U8.9@2865,1773.5 2865,1844.45 v1(3010,1989.45) ; C37.2@3000,498.58 3000.87,497.72 C35.2@3125,497.72 C33.2@3234.13,497.72 ; C37.2@3000.87,499.45 C28.2@2770,499.45 C28.2@2769.13,498.58 ; v1(3200,404.45) 3200,463.58 C33.2@3234.13,497.72 ; C33.2@3235,498.58 C33.2@3234.13,497.72 ; v1(3535,2389.45) 3588.82,2443.27 U5.7@3789.13,2443.27 U5.6@3789.13,2393.27 ; S1.1@3565,901.5 S1.1@3572.95,909.45 ; v2(3660,2179.45) 3680,2179.45 3743.82,2243.27 U5.3@3789.13,2243.27 ; W14.3@3875,498.15 3919,454.15 3919,378 3943,354 4085,354 4094,345 ; C19.1@1815.87,1159.45 1820,1163.58 C21.1@1935,1163.58 1940,1168.58 C16.1@2025,1168.58 ; C16.1@2025,1168.58 2084.13,1168.58 C18.1@2110,1194.45 ; C16.1@2025,1168.58 2049.13,1144.45 C20.1@2049.13,1039.45 2050,1038.58 C15.1@2050,899.45
  Bottom Layer w30: v1(215,1149.45) 235.28,1129.17 J2.2@235.28,939.45 ; J5.MH2@472,1179.45 709.83,941.61 D2.1@750,941.61 837.56,941.61 v1(845,949.06) ; C13.2@604.13,1749.45 v1(604.13,1828.58) ; U1.5@721.06,260.59 915,260.59 v1(915,394.45) U1.3@721.06,394.45 ; v1(855,1754.45) 866.89,1742.56 U3.9@910,1742.56 ; v1(970,774.84) 1235.39,774.84 R14.1@1265,804.45 ; W5.2@2385,1809.45 2385,1754.45 2410,1729.45 2820.94,1729.45 U8.9@2860,1768.5 ; P1.2@2860,1349.45 v1(2860,1559.45) U8.9@2860,1768.5 ; U8.9@2865,1773.5 U8.9@2860,1768.5 ; v3(3967,164) 4034,164 4056,186 4056,307 4094,345 4115,366 4115,434.45 ; C23.2@4155.43,2164.45 4195,2164.45 4315,2044.45 4315,1574.45 C24.1@4020,1279.45 4115,1184.45 4115,434.45 ; U4.1@4220,434.45 4115,434.45
GPIO4: P2.5 U2.34 | length 4435.3
  Top Layer w12: v1(1540,1129.45) 1540,1124.45 1560,1124.45 1566.26,1118.19 U2.34@1621.85,1118.19
  Bottom Layer w12: v1(1540,1129.45) 1540,1124.45 1635,1029.45 1635,714.45 1375,454.45 1105,454.45 990,339.45 990,214.45 1010,194.45 1995,194.45 2140,49.45 3440,49.45 3605,214.45 3605,334.45 3570,369.45 P2.5@3570,414.45
"INFRA IN": U2.91 U4.3 | length 2361.4
  Top Layer w12: U2.91@2228.15,1098.5 2384.06,1098.5 2395,1109.45 v1(4210,1109.45)
  Bottom Layer w12: U4.3@4210,734.45 v1(4210,1109.45)
"INFRA OUT": U2.1 U8.1 U8.2 U8.3 U8.4 | length 1554.4
  Top Layer w12: U2.1@2161.22,1342.6 2161.22,1380.67 2170,1389.45 2205,1389.45 v1(2235,1359.45) ; v1(2390,1359.45) v1(2785,1359.45) ; v1(2785,1609.45) v1(3085,1609.45)
  Bottom Layer w12: v1(2235,1359.45) v1(2390,1359.45) ; v1(2785,1359.45) v1(2785,1609.45) ; v1(3085,1609.45) 3115,1639.45 U8.4@3115,1773.5 U8.3@3165,1773.5 U8.2@3215,1773.5 U8.1@3265,1773.5
"INFRA OUT0": R23.5 U8.15 | length 126.2
  Top Layer w12: v1(3115,2079.45) 3137.01,2079.45 R23.5@3157.01,2099.45
  Bottom Layer w12: v1(3115,2079.45) U8.15@3115,2155.39
"INFRA OUT1": R23.6 U8.16 | length 175.7
  Top Layer w12: v1(3165,2044.45) 3188.5,2067.95 R23.6@3188.5,2099.45
  Bottom Layer w12: v1(3165,2044.45) U8.16@3165,2155.39
"INFRA OUT2": R23.7 U8.17 | length 168
  Top Layer w12: v1(3215,2044.45) 3220,2049.45 R23.7@3220,2099.45
  Bottom Layer w12: v1(3215,2044.45) U8.17@3215,2155.39
"INFRA OUT3": R23.8 U8.18 | length 111.9
  Top Layer w12: R23.8@3251.5,2099.45 3256.5,2094.45 v1(3290,2094.45)
  Bottom Layer w12: U8.18@3265,2155.39 3265,2119.45 v1(3290,2094.45)
LED0: U2.25 U3.1 | length 753.1
  Top Layer w12: v1(1310,1414.45) 1645,1414.45 1688.78,1370.67 U2.25@1688.78,1342.6
  Bottom Layer w12: v1(1310,1414.45) U3.1@1310,1742.56
LED1: U2.24 U3.2 | length 793.7
  Top Layer w12: v1(1260,1484.45) 1615,1484.45 1708.46,1390.98 U2.24@1708.46,1342.6
  Bottom Layer w12: v1(1260,1484.45) U3.2@1260,1742.56
LED2: U2.23 U3.3 | length 860.6
  Top Layer w12: v1(1210,1514.45) 1630,1514.45 1728.15,1416.3 U2.23@1728.15,1342.6
  Bottom Layer w12: v1(1210,1514.45) U3.3@1210,1742.56
LED3: U2.22 U3.4 | length 921.7
  Top Layer w12: v1(1160,1544.45) 1635,1544.45 1747.83,1431.61 U2.22@1747.83,1342.6
  Bottom Layer w12: v1(1160,1544.45) U3.4@1160,1742.56
LED4: U2.95 U3.5 | length 1840.1
  Top Layer w12: v1(1130,1679.45) 1415,1679.45 1515,1779.45 2030,1779.45 2355,1454.45 2355,1239.45 2292.8,1177.24 U2.95@2228.15,1177.24
  Bottom Layer w12: U3.5@1110,1742.56 1110,1699.45 v1(1130,1679.45)
LED5: U2.96 U3.6 | length 1813.1
  Top Layer w12: v1(1085,1669.45) 1105,1649.45 1435,1649.45 1530,1744.45 2025,1744.45 2330,1439.45 2330,1254.45 2272.48,1196.93 U2.96@2228.15,1196.93
  Bottom Layer w12: U3.6@1060,1742.56 1060,1694.45 v1(1085,1669.45)
LED6: U2.99 U3.7 | length 1764
  Top Layer w12: v1(1030,1669.45) 1075,1624.45 1465,1624.45 1555,1714.45 2015,1714.45 2305,1424.45 2305,1279.45 2282.22,1256.67 2228.83,1256.67 U2.99@2228.15,1255.98
  Bottom Layer w12: U3.7@1010,1742.56 1010,1689.45 v1(1030,1669.45)
LED7: U2.100 U3.8 | length 1755.3
  Top Layer w12: v1(975,1664.45) 1050,1589.45 1495,1589.45 1595,1689.45 2000,1689.45 2280,1409.45 2280,1289.45 2266.22,1275.67 U2.100@2228.15,1275.67
  Bottom Layer w12: U3.8@960,1742.56 960,1679.45 v1(975,1664.45)
MISO: J3.7 U2.30 | length 2377.3
  Top Layer w12: v1(1495,1379.45) 1495,1259.45 1557.52,1196.93 U2.30@1621.85,1196.93 ; v1(2190,1804.45) 2290,1804.45 2335,1759.45 2885,1759.45 3041.54,1915.98 J3.7@3135,1915.98
  Bottom Layer w12: v1(1495,1379.45) 1495,1729.45 1570,1804.45 v1(2190,1804.45)
MOSI: J3.3 U2.31 | length 2544.6
  Top Layer w12: v1(1460,1334.45) 1460,1229.45 1512.98,1176.46 1590,1176.46 ; v1(2245,1694.45) 2965,1694.45 3013.31,1742.76 J3.3@3135,1742.76
  Bottom Layer w12: v1(1460,1334.45) 1460,1754.45 1550,1844.45 2220,1844.45 2245,1819.45 v1(2245,1694.45)
NetC5_2: C5.2 U2.17 X1.1 | length 434.6
  Top Layer w12: X1.1@1748.94,1629.45 1846.26,1532.13 U2.17@1846.26,1342.6
  Bottom Layer w12: C5.2@1650,1609.02 1728.5,1609.02 X1.1@1748.94,1629.45
NetC6_2: C6.2 U2.16 X1.2 | length 415.4
  Top Layer w12: U2.16@1865.94,1342.6 1865.94,1554.33 X1.2@1941.06,1629.45
  Bottom Layer w12: C6.2@1850,1614.02 1925.63,1614.02 X1.2@1941.06,1629.45